# Altium PCB ESP32VoltageRegulatorPCB.PcbDoc
Units mm, origin at the board's own origin, x right, y up, seen from the top; angles counter-clockwise.
Board outline 118.06 x 43.94 mm, 2 copper layers (Top Layer, Bottom Layer); 50 components, 33 nets, 178 pads, 4 vias.
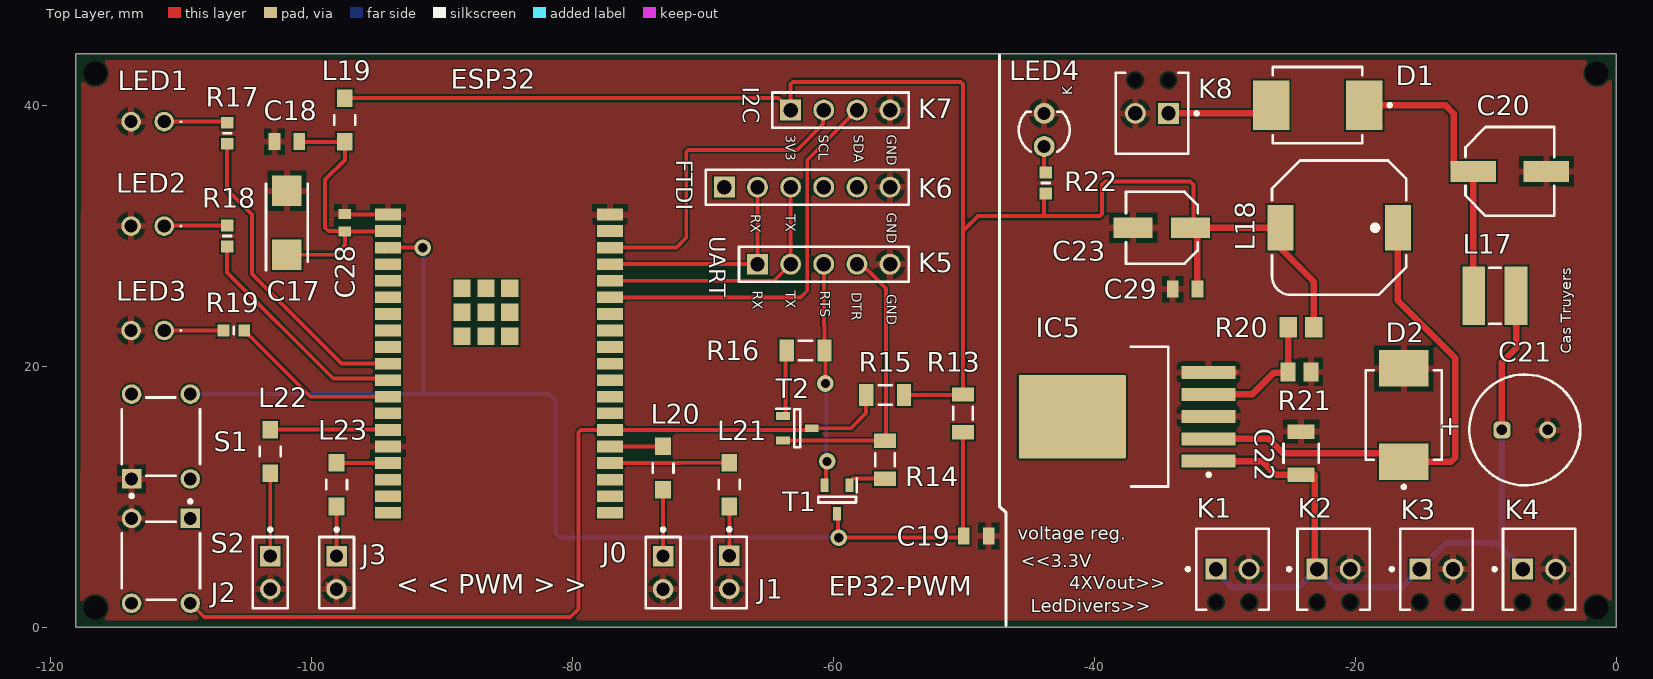
[diagram p0: Top Layer view]
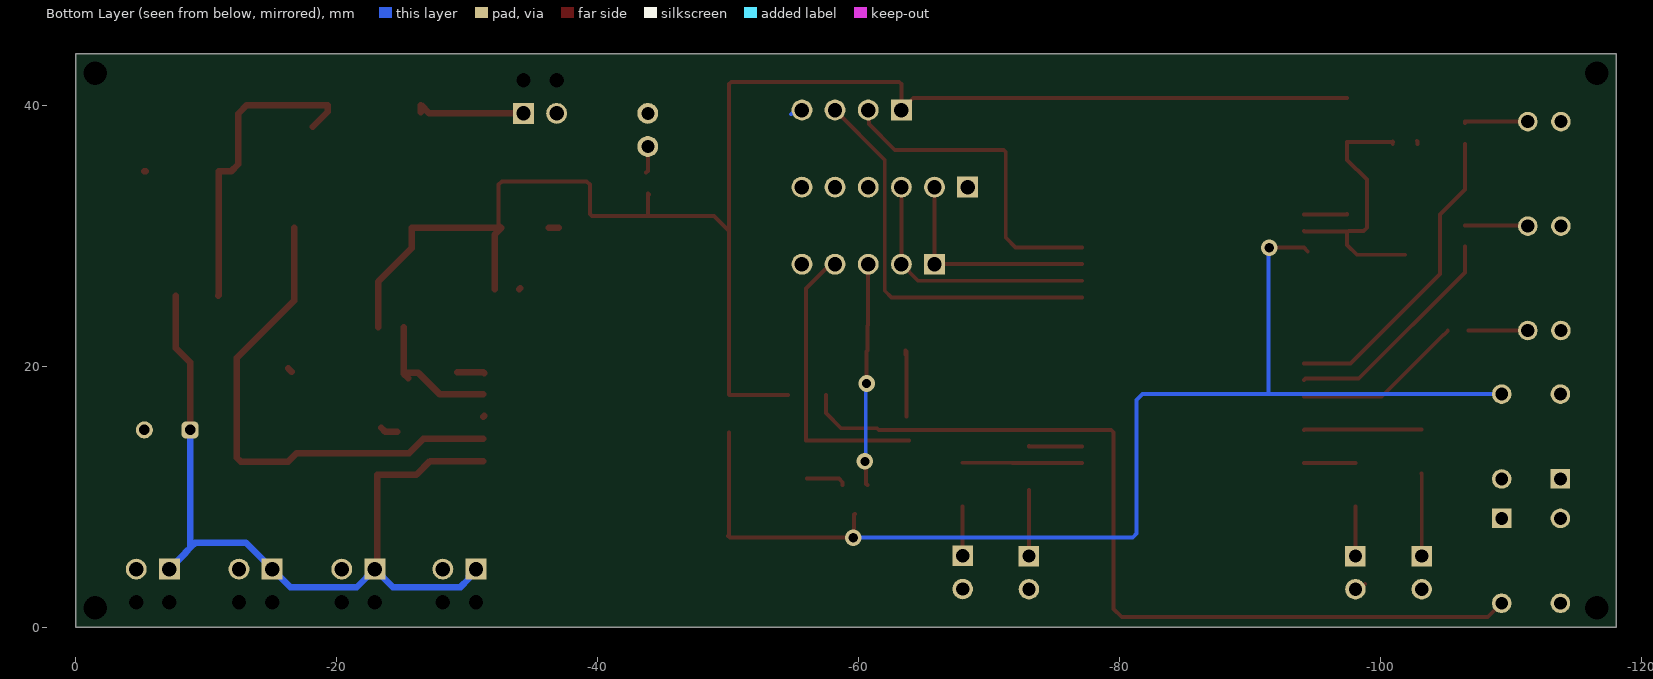
[diagram p1: Bottom Layer view, seen from below]
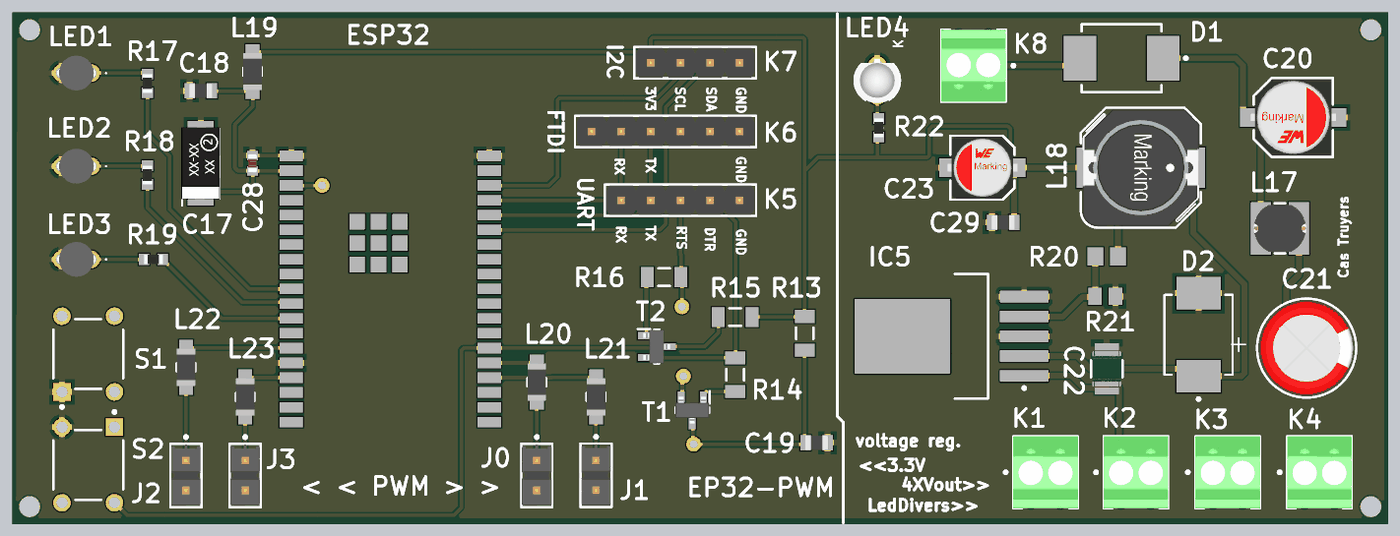
[diagram p2: 3D render of the assembled board from above, using the file's embedded part models]

## Layer stack, top to bottom
Top Solder: solder mask 0.0102, Solder Resist, Dk 3.5
Top Layer: signal copper 0.0356
Dielectric 1: dielectric 0.32, FR-4, Dk 4.8
Bottom Layer: signal copper 0.0356
Bottom Solder: solder mask 0.0102, Solder Resist, Dk 3.5

## Board outline
-118.059,0 0,0 0,43.942 -118.059,43.942

## Design rules (kind name [scope] priority, off if disabled: settings)
Clearance [All] p1: gap=0.128 ignorepadtopadclearanceinfootprint=FALSE
PolygonConnect [All] p1: connectstyle=Relief reliefconductorwidth=0.5 reliefentries=4 polygonreliefangle="90 Angle" airgapwidth=0.35
RoutingVias [All] p1: holewidth=0.711 width=1.27 viastyle="Through Hole" minholewidth=0.711 minwidth=1.27 maxholewidth=0.711 maxwidth=1.27
SMDNeckDown [All] p1: percent=50.000
SilkToSolderMaskClearance [IsPad] p1: minsilkscreentomaskgap=0.15 clearancetoexposedcopper=TRUE
SolderMaskExpansion [All] p1: expansion=0.102 istentingtop=FALSE
Width [All] p1: maxlimit=0.5 minlimit=0.3 preferedwidth=0.3
29 further rules are at their usual default settings.

## Classes and differential pairs
component class VoltageRegulator: C20 C21 C22 C23 C29 D1 D2 IC5 K1 K2 K3 K4 K8 L17 L18 LED4 R20 R21 R22
component class ESP32Schematic: C17 C18 C19 C28 ESP32 J0 J1 J2 J3 K5 K6 K7 L19 L20 L21 L22 L23 LED1 LED2 LED3 R13 R14 R15 R16 R17 R18 R19 S1 S2 T1 T2

## Components (designator, comment, footprint, x,y, rotation, side; value= is the part's Value field where it differs from the comment)
C17 "" CAPPM6032X280N -101.879,30.988 r90 top
C18 "100nF" WCAP-CSGP_0805_H=1.25mm -101.879,37.211 r180 top
C19 "100nF" WCAP-CSGP_0805_H=1.25mm -49.047,6.985 r0 top
C20 "4.7uF" WCAP-PSLP_D6.3H7.7 -8.153,34.925 r180 top
C21 "27uF" WCAP-ATUL_D8H11.5 -7.01,15.113 r180 top
C22 "" FP-GRM32-MFG -24.155,13.335 r90 top value=4.7uF
C23 "100uF" WCAP-PSLP_D5H5.5 -34.823,30.607 r0 top
C28 "" CAPC1608X87N -97.434,30.988 r90 top
C29 "100nF" WCAP-CSGP_0805_H=1.25mm -33.045,25.908 r0 top
D1 "" ONSC-SMC-2-403-03_V -22.885,40.005 r180 top
D2 "" ONSC-SMC-2-403-03_V -16.281,16.256 r90 top
ESP32 "ESP32-WROVER-B" ESP32-WROVER-B -85.623,20.193 r0 top (schematic designator U)
IC5 "LM2576HVS-ADJ/NOPB" KTT0005B_N -37.49,16.129 r180 top
J0 "" FP-TSW-102-07-G-S-MFG -73.05,4.175 r270 top
J1 "" FP-TSW-102-07-G-S-MFG -67.97,4.191 r270 top
J2 "" FP-TSW-102-07-G-S-MFG -103.149,4.175 r270 top
J3 "" FP-TSW-102-07-G-S-MFG -98.069,4.175 r270 top
K1 "1725656" PHOE-1725656-2 -29.403,4.445 r0 top
K2 "1725656" PHOE-1725656-2 -21.656,4.445 r0 top
K3 "1725656" PHOE-1725656-2 -13.782,4.445 r0 top
K4 "1725656" PHOE-1725656-2 -5.908,4.445 r0 top
K5 "61300511121" 61300511121 -60.731,27.813 r0 top
K6 "61300611121" 61300611121 -62.001,33.718 r0 top
K7 "61300411121" 61300411121 -59.461,39.624 r0 top
K8 "1725656" PHOE-1725656-2 -35.585,39.37 r180 top
L17 "2.2uH, 2.5A" WE-PD2_4532 -9.296,25.4 r0 top
L18 "470uH" WE-PD_1050P -21.234,30.607 r270 top
L19 "" SMD-1206 -97.434,38.862 r270 top
L20 "" SMD-1206 -73.05,12.192 r270 top
L21 "" SMD-1206 -67.97,10.922 r270 top
L22 "" SMD-1206 -103.149,13.462 r90 top
L23 "" SMD-1206 -98.069,10.922 r90 top
LED1 "" 151033GS03000 -111.277,38.735 r180 top
LED2 "" 151033GS03000 -111.277,30.734 r180 top
LED3 "" 151033GS03000 -111.277,22.733 r180 top
LED4 "" "Type 3mm" -43.84,38.1 r90 top
R13 "" RESC3216X60X45NL10T20 -50.063,16.383 r90 top
R14 "" RESC3216X60X45NL10T20 -56.032,12.827 r90 top
R15 "" RESC3216X60X45NL10T20 -56.032,17.78 r0 top
R16 "" RESC3216X60X45NL10T20 -62.128,21.209 r0 top
R17 "" RESC1608X55N -106.451,37.846 r270 top
R18 "" RESC1608X55N -106.451,29.972 r270 top
R19 "" RESC1608X55N -105.943,22.733 r0 top
R20 "2K7" RESC2013X70X40ML20T20 -24.155,22.987 r0 top
R21 "" RESC2013X70X40NL20T20 -24.282,19.558 r180 top
R22 "" RESC1608X55N -43.713,34.036 r270 top
S1 "" TECO-1825910-6_V -111.531,14.605 r90 top
S2 "" TECO-1825910-6_V -111.531,5.08 r270 top
T1 "" SOT95P230X110-3N -59.715,9.779 r270 top
T2 "" SOT95P230X110-3N -62.763,15.24 r0 top

## Footprints (in the part's own frame and the unit in brackets; to place one, negate y for a bottom-side part, rotate by r counter-clockwise, add the part's x,y. Pads: shape width x height; smd on the part's side, far side on the other; paste and mask are expansions set on the pad)
151033GS03000 [mm]
  round 1.5 hole 1: 1(0,0) 2(2.54,0)
  silkscreen extent -1.33,-0.05 -1.23,0.05, body extent -0.4,-1.5 2.94,1.5, height 5.65
61300411121 [mm] "Pin Header, pitch 2.54 mm, THT, Vertical, single row, 4p"
  rect 1.6x1.6 hole 1.1: 1(-3.81,0)
  round 1.6 hole 1.1: 2(-1.27,0) 3(1.27,0) 4(3.81,0)
  silkscreen extent -5.23,-1.34 5.23,1.34, body extent -5.08,-1.27 5.08,1.27, height 8.57
61300511121 [mm] "Pin Header, pitch 2.54 mm, THT, Vertical, single row, 5p"
  rect 1.6x1.6 hole 1.1: 1(-5.08,0)
  round 1.6 hole 1.1: 2(-2.54,0) 3(0,0) 4(2.54,0) 5(5.08,0)
  silkscreen extent -6.5,-1.34 6.5,1.34, body extent -6.35,-1.27 6.35,1.27, height 8.57
61300611121 [mm] "Pin Header, pitch 2.54 mm, THT, Vertical, single row, 6p"
  rect 1.6x1.6 hole 1.1: 1(-6.35,0)
  round 1.6 hole 1.1: 2(-3.81,0) 3(-1.27,0) 4(1.27,0) 5(3.81,0) 6(6.35,0)
  silkscreen extent -7.77,-1.34 7.77,1.34, body extent -7.62,-1.27 7.62,1.27, height 8.57
CAPC1608X87N [mm]
  rect 0.8x0.94 smd: 1(-0.67,0) 2(0.67,0)
  body extent -0.8,-0.4 0.8,0.4, height 0.87
CAPPM6032X280N [mm]
  rect 2.35x2.25 smd: 1(-2.45,0) 2(2.45,0)
  silkscreen extent -3.62,-1.6 3,1.6, body extent -3.1,-1.67 3.1,1.68, height 2.54
ESP32-WROVER-B [mm]
  rect 2x0.9 smd: P$1(-8.5,11.43) P$2(-8.5,10.16) P$3(-8.5,8.89) P$4(-8.5,7.62) P$5(-8.5,6.35) P$6(-8.5,5.08) P$7(-8.5,3.81) P$8(-8.5,2.54) P$9(-8.5,1.27) P$10(-8.5,0) P$11(-8.5,-1.27) P$12(-8.5,-2.54) P$13(-8.5,-3.81) P$14(-8.5,-5.08) P$15(-8.5,-6.35) P$16(-8.5,-7.62) P$17(-8.5,-8.89) P$18(-8.5,-10.16) P$19(-8.5,-11.43) P$20(8.5,-11.43) P$21(8.5,-10.16) P$22(8.5,-8.89) P$23(8.5,-7.62) P$24(8.5,-6.35) P$25(8.5,-5.08) P$26(8.5,-3.81) P$27(8.5,-2.54) P$28(8.5,-1.27) P$29(8.5,0) P$30(8.5,1.27) P$31(8.5,2.54) P$32(8.5,3.81) P$33(8.5,5.08) P$34(8.5,6.35) P$35(8.5,7.62) P$36(8.5,8.89) P$37(8.5,10.16) P$38(8.5,11.43)
  rect 1.33x1.33 smd: P$39(-1,3.93) P$40(0.835,3.93) P$41(0.835,5.765) P$42(-1,5.765) P$43(-2.835,5.765) P$44(-2.835,3.93) P$45(-2.835,2.095) P$46(-1,2.095) P$47(0.835,2.095)
FP-GRM32-MFG [mm]
  rect 1.1x2.05 smd paste+0 mask+0: 1(-1.65,0) 2(1.65,0)
  silkscreen extent -0.73,-1.35 0.73,1.35, body extent -2.3,-1.45 2.3,1.45, height 0.25
FP-TSW-102-07-G-S-MFG [mm]
  rect 1.57x1.57 hole 1.02 paste-1000 mask+0: 1(-1.27,0)
  round 1.57 hole 1.02 paste-1000 mask+0: 2(1.27,0)
  silkscreen extent -3.42,-1.34 2.73,1.34, body extent -2.83,-1.44 2.83,1.44, height 0.25
KTT0005B_N [mm] "DPAK, 5-Leads, Body 10.65x9.65mm, Pitch 1.7mm, IPC Medium Density"
  rrect10% 4.15x1 smd: 1(-6.25,3.4) 2(-6.25,1.7) 3(-6.25,0) 4(-6.25,-1.7) 5(-6.25,-3.4)
  rrect2% 8.2x6.4 smd: 6(4.2,0)
  silkscreen extent -6.38,-5.35 -0.3,5.35, body extent -3.15,-5.32 6.5,5.33, height 4.83
ONSC-SMC-2-403-03_V [mil] "Molded, 2-Leads, Body 6.86x5.84mm"
  rect 110x150 smd: 1(-140.49,0) 2(140.49,0)
  silkscreen extent -222,-115 135,115, body extent -135,-115 135,115, height 99
PHOE-1725656-2 [mm] "Connector, 2-Leads, Body 6.2x5.4mm, Pitch 2.54mm"
  rect 1.6x1.6 hole 1.1: 1(-1.27,0)
  round 1.6 hole 1.1: 2(1.27,0)
  round 0 hole 1.1 unplated: MH1(-1.27,-2.54) MH2(1.27,-2.54)
  silkscreen extent -3.54,-3.1 2.77,3.1, body extent -2.77,-3.1 2.77,3.1, height 9
RESC1608X55N [mm]
  rect 0.9x0.95 smd: 1(-0.8,0) 2(0.8,0)
  silkscreen extent 0,-0.3 0,0.3, body extent -0.8,-0.4 0.8,0.4, height 0.55
RESC2013X70X40ML20T20 [mm] "Chip Resistor, 2-Leads, Body 2.00x1.25mm, IPC Low Density"
  rect 1.35x1.55 smd: 1(-0.975,0) 2(0.975,0)
  body extent -1.1,-0.72 1.1,0.72, height 0.7
RESC2013X70X40NL20T20 [mm] "Chip Resistor, 2-Leads, Body 2.00x1.25mm, IPC Medium Density"
  rect 1.15x1.45 smd: 1(-0.875,0) 2(0.875,0)
  body extent -1.1,-0.72 1.1,0.72, height 0.7
RESC3216X60X45NL10T20 [mm] "Chip Resistor, 2-Leads, Body 3.20x1.60mm, IPC Medium Density"
  rect 1.1x1.7 smd: 1(-1.45,0) 2(1.45,0)
  silkscreen extent -0.5,-0.75 0.5,0.75, body extent -1.65,-0.85 1.65,0.85, height 0.6
SMD-1206 [mm] "Chip Inductor, 2-Leads, Body 3.2x1.6mm"
  rect 1.35x1.2 smd: 1(-1.675,0) 2(1.675,0)
  silkscreen extent -0.35,-0.8 0.35,0.8, body extent -1.6,-0.8 1.6,0.8, height 1.09
SOT95P230X110-3N [mm]
  rect 1.05x0.6 smd: 1(-1.1,0.95) 2(-1.1,-0.95) 3(1.1,0)
  silkscreen extent -1.62,-1.45 0.22,1.5, body extent -1.15,-1.45 1.15,1.45, height 1.1
TECO-1825910-6_V [mm] "Switch, 4-Leads, Body 5.99x5.99mm"
  rect 1.5x1.5 hole 0.99: 1(-3.25,2.25)
  round 1.5 hole 0.99: 2(3.25,2.25) 3(-3.25,-2.25) 4(3.25,-2.25)
  silkscreen extent -4.67,-3 3,3, body extent -3,-2.99 2.99,3, height 5
"Type 3mm" [mm] "THT, LED-3mm, 2pin- Body 4.15mm(max)"
  round 1.6 hole 1: 1(1.27,0) 2(-1.27,0)
  silkscreen extent -1.66,-1.95 1.4,1.95, body extent -1.93,-1.94 1.87,1.94, height 10.5
WCAP-ATUL_D8H11.5 [mm] "Aluminum Electrolytic Capacitors, 8x11.5mm"
  rrect50% 1.3x1.3 hole 0.8: 1(1.75,0)
  round 1.3 hole 0.8: 2(-1.75,0)
  silkscreen extent -4.25,-4.25 4.25,4.25, body extent -3.99,-4 4,4, height 11.81
WCAP-CSGP_0805_H=1.25mm [mm] "Ceramic Capacitors, body 2x1.25mm"
  rect 0.9x1.3 smd: 1(-0.95,0) 2(0.95,0)
  body extent -1,-0.62 1,0.63, height 1.25
WCAP-PSLP_D5H5.5 [mm] "Aluminum Polymer Capacitors, body diameter 5mm"
  rect 3x1.6 smd: 1(2.2,0) 2(-2.2,0)
  silkscreen extent -2.75,-2.75 2.75,2.75, body extent -3,-2.65 3,2.65, height 5.5
WCAP-PSLP_D6.3H7.7 [mm] "Aluminum Polymer Capacitors, body diameter 6.3mm"
  rect 3.5x1.6 smd: 1(2.8,0) 2(-2.8,0)
  silkscreen extent -3.4,-3.4 3.4,3.4, body extent -3.65,-3.3 3.65,3.3, height 7.7
WE-PD2_4532 [mm] "SMD Power Inductor, 2-Leads, body 4x4.5mm"
  rect 1.75x4.5 smd: 1(-1.625,0) 2(1.625,0)
  silkscreen extent -0.45,-2.15 0.45,2.15, body extent -2.25,-2 2.25,2, height 3.22
WE-PD_1050P [mm] "SMD Shielded Power Inductor, 2-leads, body 10x10mm"
  rect 3.5x2 smd: 1(0,4.5) 2(0,-4.5)
  silkscreen extent -5.15,-5.15 5.15,5.15, body extent -5,-5 5,5, height 4.79

## Part data
C17: library part 293D476X9010C2TE3, "Capacitor Polarised", Manufacturer_Name=Vishay, Mouser Part Number=74-293D476X9010C2TE3, Arrow Part Number=293D476X9010C2TE3, Arrow Price/Stock=https://www.arrow.com/en/products/293d476x9010c2te3/vishay, Datasheet Link=http://www.vishay.com/doc?40002, Height=2.8mm, Manufacturer_Part_Number=293D476X9010C2TE3, Mouser Price/Stock=https://www.mouser.co.uk/ProductDetail/Vishay-Sprague/293D476X9010C2TE3?qs=L4BSZja3YaLjW7yb5EwZTw%3D%3D
C18 C19 C29: library part 885012207128, "WCAP-CSGP Multilayer Ceramic Chip Capacitor, General Purpose, size 0805, X7R, 100nF, 100V", Capacitance Tolerance=+/-10%, Isolation Resistance=>=1GOhm, Manufacturer="Wurth Elektronik", Operating Temperature="-55 to +125degC", Rated Voltage=100VDC, Capacitance=100nF, Ceramic Type=X7R, ComponentLink1Description=Manufacturer, ComponentLink1URL=http://www.we-online.de, ComponentLink2Description=Datasheet, ComponentLink2URL=https://www.we-online.com/catalog/datasheet/885012207128.pdf, Dissipation Factor=#NAME?, Height=1.25mm, Manufacturer Part Number=885012207128, Mounting Technology=SMT, Packaging="Tape and Reel", Published Date="May 2020", Size=0805, Technical Reference=X7R0805104K100DFCT10000
C20: library part 875105945001, "WCAP-PSLP Aluminum Polymer Capacitor, V-Chip, SMT, D6.3xH7.7mm, 4.7uF, 100V", Capacitance Tolerance=+/-20%, Leakage Current=600uA, Manufacturer="Wurth Elektronik", Operating Temperature="-55 to +105degC", Rated Voltage=100VDC, Ripple Current=1060mA, Capacitance=4.7uF, ComponentLink1Description=Manufacturer, ComponentLink1URL=http://www.we-online.de, ComponentLink2Description=Datasheet, ComponentLink2URL=https://www.we-online.com/catalog/datasheet/875105945001.pdf, Diameter=6.3mm, Dissipation Factor=12%, Endurance=2000h, ESR=100mOhm, Height=7.7mm, Manufacturer Part Number=875105945001, Mounting Technology=SMT, Packaging="Tape and Reel", Published Date="October 2020", Technical Reference=PSED0774R7M100DVCTCB000
C21: library part 860040874001, "WCAP-ATUL Aluminum Electrolytic Capacitor, Radial, THT, D8xH11.5mm, 27uF, 100V", Capacitance Tolerance=+/-20%, Leakage Current=27uA, Manufacturer="Wurth Elektronik", Operating Temperature="-40 to +105degC", Rated Voltage=100VDC, Ripple Current=300mA, Capacitance=27uF, ComponentLink1Description=Manufacturer, ComponentLink1URL=http://www.we-online.de, ComponentLink2Description=Datasheet, ComponentLink2URL=https://www.we-online.com/catalog/datasheet/860040874001.pdf, Diameter=8mm, Dissipation Factor=9%, Endurance=7000h, Height=11.5mm, Manufacturer Part Number=860040874001, Mounting Technology=THT, Packaging="Ammo Pack", Published Date="October 2020", Technical Reference=ATDE115270M100DSPA7G000
C22: library part CMP-1038-02162-3, "CAP CER 4.7UF 50V X7R 1210", Capacitance=4.7uF, Manufacturer=Murata, Manufacturer Part Number=GRM32ER71H475KA88L, Package=GRM32, Temperature="-55°C to +125°C", Temperature Characteristic=X7R, Temperature Coefficient=15%, Temperature Range High=+125°C, Temperature Range Low=-55°C, Tolerance=10%, Voltage Rating=50V, Automotive=No, Category=Cap, ComponentLink2Description=Datasheet, ComponentLink2URL=https://search.murata.co.jp/Ceramy/image/img/A01X/G101/ENG/GRM32ER71H475KA88-01A.pdf, Device Class L1="Passive Components", Device Class L2=Capacitors, Device Class L3="Ceramic Capacitors", Digikey Description="CAP CER 4.7UF 50V X7R 1210", Height=2.7mm, Lead Free=Yes, Material=Ceramic, Mouser Description="Capacitor Capacitance tolerance: ±10% Ceramic type: X7R Construction form: 1210 Capacitance: 4.7 µF Rated voltage: 50...", Octopart=https://octopart.com/grm32er71h475ka88l-murata-196576, RoHS=TRUE
C23: library part 875105242010, "WCAP-PSLP Aluminum Polymer Capacitor, V-Chip, SMT, D5xH5.5mm, 100uF, 10V", Capacitance Tolerance=+/-20%, Leakage Current=300uA, Manufacturer="Wurth Elektronik", Operating Temperature="-55 to +105degC", Rated Voltage=10VDC, Ripple Current=1970mA, Capacitance=100uF, ComponentLink1Description=Manufacturer, ComponentLink1URL=http://www.we-online.de, ComponentLink2Description=Datasheet, ComponentLink2URL=https://www.we-online.com/catalog/datasheet/875105242010.pdf, Diameter=5mm, Dissipation Factor=8%, Endurance=2000h, ESR=30mOhm, Height=5.5mm, Manufacturer Part Number=875105242010, Mounting Technology=SMT, Packaging="Tape and Reel", Published Date="October 2020", Technical Reference=PSEC055101M010DVCTBB000
C28: library part 885012206034, "Capacitor", Manufacturer_Name="Wurth Elektronik", Mouser Part Number=710-885012206034, Datasheet Link=https://katalog.we-online.com/pbs/datasheet/885012206034.pdf, Height=0.87mm, Manufacturer_Part_Number=885012206034, Mouser Price/Stock=https://www.mouser.com/Search/Refine.aspx?Keyword=710-885012206034
D1 D2: library part CMP-1055-00390-1, "Schottky Power Rectifier, 2-Pin SMC, Pb-Free, Tape and Reel", Manufacturer="On Semiconductor", PartNumber=MBRS540T3G, ComponentLink1Description="Manufacturer URL", ComponentLink1URL=http://www.onsemi.com/, ComponentLink2Description=Datasheet, ComponentLink2URL=http://www.onsemi.cn/pub_link/Collateral/MBRS540T3-D.PDF, ComponentLink3Description="Package Specification", ComponentLink3URL=http://www.onsemi.com/pub_link/Collateral/403-03.PDF, Configuration=Single, DatasheetVersion="Rev. 8", IFSM Max (A)=190, Mounting Technology="Surface Mount", PackageDescription="2-Pin Small Molded Package, J-Bend Lead, Body 5.845 x 6.855 mm", PackageReference=SMC-2-403-03, PackageVersion="Rev. E, 08/2005", Packing="Tape and Reel", RoHS=TRUE
ESP32: "SMD MODULE ESP32-D0WD 32MBIT", Package="Module Espressif Systems", Availability=Unavailable, ComponentLink1Description="New link", MF="Espressif Systems", MP=ESP32-WROVER-B, Price=None, SnapEDA_Link=https://www.snapeda.com/parts/ESP32-WROVER-B/Espressif%20Systems/view-part/2877843/?ref=snap
IC5: library part CMP-0069-00134-3, "SIMPLE SWITCHER® 3A Step-Down Voltage Regulator, 5-pin TO-263, Pb-Free", Manufacturer="Texas Instruments", PackageTopMarking="NSUZXYTTE#*LM2576*HVS-ADJ P+", PowerWise=N, Code_JEDEC=MO-169-AB, ComponentLink1Description="Datasheet URL", ComponentLink1URL=http://www.ti.com/general/docs/lit/getliterature.tsp?genericPartNumber=LM2576HV&fileType=pdf, CompType=Switcher, PackageDescription="TO-263, Molded, .400 x .390 x .180in, 5 Lead, .067in Pitch, Surface Mount", PackageReference=KTT0005B, PinCount=5, RoHS=Y
J0 J1 J2 J3: library part CMP-02766-000084-1, "CONN HEADER VERT 2POS 2.54MM", Current Rating=6.3A, Manufacturer=Samtec, Manufacturer Part Number=TSW-102-07-G-S, Temperature="-55°C to +125°C", Temperature Range High=+125°C, Temperature Range Low=-55°C, Voltage Rating=550V, Automotive=No, Category=Conn, ComponentLink2Description=Datasheet, ComponentLink2URL=http://suddendocs.samtec.com/catalog_english/tsw_th.pdf, Conn Gender=Male, Conn Orientation=Straight, Contact Material=Gold,Nickel, Device Class L1=Connectors, Device Class L2="Headers and Wire Housings", Device Class L3=unset, Digikey Description="CONN HEADER VERT 2POS 2.54MM", Footprint Url=http://suddendocs.samtec.com/prints/tsw-xxx-xx-x-x-xx-xxx-footprint.pdf, Height=8.71mm, Lead Free=Yes, Mouser Description="Conn Unshrouded Header HDR 2 POS 2.54mm Solder ST Thru-Hole Automotive Bulk", Number Of Contacts=2, Number Of Rows=1, Octopart=https://octopart.com/tsw-102-07-g-s-samtec-272197, Package=TSW-102-07-G-S, Pitch=2.54mm, RoHS=TRUE
K1 K2 K3 K4 K8: library part CMP-2000-05299-1, "Male Header, Pitch 2.54 mm, 1 x 2 Position, Height 9 mm, Tail Length 3.5 mm", Colour=Green, Manufacturer="Phoenix Contact", Content=250pc(s), Datasheet URL=http://datasheet.octopart.com/1725656-Phoenix-Contact-datasheet-5302866.pdf, Datasheet Version=Apr-08, Industrial packaging=Yes, Manufacturer part No.=1725656, Manufacturer URL=http://www.phoenixcontact.com/, Number Of Contacts=2, Pitch=2.54mm, Type=MPT0,5/2-2,54
K5: library part CMP-1502-01068-1, "THT Vertical Pin Header WR-PHD, Pitch 2.54 mm, Single Row, 5 pins", Contact Resistance=20mOhm, Manufacturer="Wurth Elektronik", Operating Temperature=-40to105degC, Rated Current=3A, Withstanding Voltage=500VAC, Working Voltage=250VAC, Datasheet URL=https://katalog.we-online.de/em/datasheet/6130xx11121.pdf, Gender=Male, Manufacturer URL=http://www.we-online.de, Mounting Technology=THT, Orientation=Vertical, Package Reference=61300511121, Packaging=Bag, Part Number=61300511121, Pin Number=5, Pitch=2.54mm, Publisher=WurthElektronik, Row Number=Single
K6: library part CMP-1502-01070-1, "THT Vertical Pin Header WR-PHD, Pitch 2.54 mm, Single Row, 6 pins", Contact Resistance=20mOhm, Manufacturer="Wurth Elektronik", Operating Temperature=-40to105degC, Rated Current=3A, Withstanding Voltage=500VAC, Working Voltage=250VAC, Datasheet URL=https://katalog.we-online.de/em/datasheet/6130xx11121.pdf, Gender=Male, Manufacturer URL=http://www.we-online.de, Mounting Technology=THT, Orientation=Vertical, Package Reference=61300611121, Packaging=Bag, Part Number=61300611121, Pin Number=6, Pitch=2.54mm, Publisher=WurthElektronik, Row Number=Single
K7: library part CMP-1502-01064-1, "THT Vertical Pin Header WR-PHD, Pitch 2.54 mm, Single Row, 4 pins", Contact Resistance=20mOhm, Manufacturer="Wurth Elektronik", Operating Temperature=-40to105degC, Rated Current=3A, Withstanding Voltage=500VAC, Working Voltage=250VAC, Datasheet URL=https://katalog.we-online.de/em/datasheet/6130xx11121.pdf, Gender=Male, Manufacturer URL=http://www.we-online.de, Mounting Technology=THT, Orientation=Vertical, Package Reference=61300411121, Packaging=Bag, Part Number=61300411121, Pin Number=4, Pitch=2.54mm, Publisher=WurthElektronik, Row Number=Single
L17: library part 744773022, "WE-PD2 SMT Power Inductor, size 4532, 2.2uH, 2.5A", DC Resistance max.=0.071Ohm, DC Resistance typ.=0.034Ohm, Inductance=2.2uH, Manufacturer="Wurth Elektronik", Operating Temperature="-40 to +125degC", Rated Current=2.5A, Saturation Current=3.38A, Self Resonant Frequency=85MHz, ComponentLink1Description=Manufacturer, ComponentLink1URL=http://www.we-online.de, ComponentLink2Description=Datasheet, ComponentLink2URL=https://www.we-online.com/catalog/datasheet/744773022.pdf, Manufacturer Part Number=744773022, Mounting Technology=SMT, Packaging="Tape and Reel", Published Date="April 2020", Size=4532
L18: library part 7447714471, "WE-PD SMT Power Inductor, size 1050P, 470uH, 0.6A, 960mOhm", DC Resistance max.=1100mOhm, DC Resistance typ.=960mOhm, Manufacturer="Wurth Elektronik", Operating Temperature="-40 to +150degC", Rated Current=0.6A, Saturation Current=0.82A, Self Resonant Frequency=2.5MHz, ComponentLink1Description=Manufacturer, ComponentLink1URL=http://www.we-online.de, ComponentLink2Description=Datasheet, ComponentLink2URL=https://www.we-online.com/catalog/datasheet/7447714471.pdf, Inductance=470uH, Manufacturer Part Number=7447714471, Mounting Technology=SMT, Packaging="Tape and Reel", Published Date="August 2020", Size=1050P, Type=Performance
L19 L20 L21 L22 L23: library part CMP-0220-00019-1, "SMD EMI Suppression Ferrite Bead WE-CBF, Z = 31Ohm", ComponentLink1Description="Manufacturer Link", ComponentLink1URL=http://www.we-online.com, ComponentLink2Description=Datasheet, ComponentLink2URL=http://www.we-online.de/katalog/media/pdf/742792112.pdf, DatasheetVersion=Dec-2005, Impedance=31Ohm, PackageDescription="Chip Inductor, 2-Leads, Body 3.2 x 1.6 mm", PackageReference=SMD-1206, PackageVersion=2007
LED1 LED2 LED3: library part 151033GS03000, "LED", Manufacturer_Name="Wurth Elektronik", Mouser Part Number=710-151033GS03000, Datasheet Link=https://www.mouser.com/datasheet/2/445/151033GS03000-1715304.pdf, Height=5.55mm, Manufacturer_Part_Number=151033GS03000, Mouser Price/Stock=https://www.mouser.com/Search/Refine.aspx?Keyword=710-151033GS03000
LED4: library part CMP-1489-00002-1, "THT LED round mono-color waterclear, WL-TMRW , Blue", Emitting color=Blue, Manufacturer="Wuerth Elektronik", PartNumber=151033BS03000, ComponentLink1Description="Manufacturer URL", ComponentLink1URL=http://www.we-online.com, ComponentLink2Description=Datasheet, ComponentLink2URL=http://katalog.we-online.de/pbs/datasheet/7448042001.pdfhttp://katalog.we-online.de/pbs/datasheet/7448042001.pdfhttp://katalog.we-online.de/pbs/datasheet/7448042001.pdfhttp://katalog.we-online.de/pbs/datasheet/151033BS03000.pdf, PackageReference="Type 3mm"
R13 R14 R15 R16: library part CMP-2003-02453-1, Manufacturer="Vishay Dale", Part Number=CRCW120610K0JNEB
R17 R18 R19 R22: library part RC0603JR-071KL, "Resistor", Manufacturer_Name="YAGEO (PHYCOMP)", Mouser Part Number=603-RC0603JR-071KL, Arrow Part Number=RC0603JR-071KL, Arrow Price/Stock=https://www.arrow.com/en/products/rc0603jr-071kl/yageo, Datasheet Link=http://www.yageo.com/documents/recent/PYu-RC0603_51_RoHS_L_v5.pdf, Height=0.55mm, Manufacturer_Part_Number=RC0603JR-071KL, Mouser Price/Stock=https://www.mouser.co.uk/ProductDetail/Yageo/RC0603JR-071KL?qs=%2F9ZTgpVJnN7bctK4R%2FDEoA%3D%3D
R20: library part CMP-2001-00387-1, Manufacturer=Panasonic, Part Number=ERJ-6GEYJ272V
R21: library part CMP-2001-00515-1, Manufacturer=Panasonic, Part Number=ERJ6ENF1601V
S1 S2: library part CMP-1684-00021-1, "Tact Switch, SPST-NO, 0.05 A, -35 to 85 degC, 4-Pin THD, RoHS, Bulk", Actuator Color=Black, Contact Rating @ Voltage=0.05A@24VDC, Dielectric Strength=500VAC, Manufacturer="TE Connectivity", Maximum AC Voltage Rating=N/A, Maximum Contact Resistance=100mOhm, Maximum DC Voltage Rating=24V, Minimum Insulation Resistance=100MOhm, Operating Temperature=-35to85C, Package Description="4-Pin Through Hole Device, Body 5.99 x 5.99 mm, Pitch 6.5 mm", Package Reference=THD, Part No=1825910-6, Actuator Length=1.4mm, Actuator Material=PolybutyleneTerephthalate, Actuator Style=RoundButton, Base Material=N/A, Body Orientation=Straight, Bushing Type=Unthreaded, Contact Material=CopperAlloy, Contact Plating=Silver, Datasheet URL=http://www.te.com/commerce/DocumentDelivery/DDEController?Action=showdoc&DocId=Customer+Drawing%7F1825910%7FC9%7Fpdf%7FEnglish%7FENG_CD_1825910_C9.pdf%7F1825910-6, Datasheet Version="Rev. C9", Dimension=5.99x5mm, Electrical Life=100000Cycles, Family=1825910, Function=MomentaryContact, Housing Material=N/A, Illumination=N/R, Manufacturer URL=http://www.te.com, Mechanical Life=100000Cycles, Mounting=ThroughHole, Packaging=N/A, Pole Throw Configuration=SPST, Product Weight=N/A, RoHS=Yes, Seal Description=N/A, Seal Location=N/A, Switch Configuration=OFF(ON), Terminal Type=PCPins, Thread Size=N/R
T1 T2: library part BC847C_AU,215, "Transistor BJT NPN", Manufacturer_Name=Nexperia, Manufacturer_Part_Number=BC847C/AU,215, Datasheet Link=http://assets.nexperia.com/documents/data-sheet/BC847_SER.pdf, Height=1.1mm

## Free pads (board coordinates)
  round 1.524 hole 1.8: 5(-116.561,1.499) 5(-116.561,42.443) 5(-1.499,1.499) 5(-1.499,42.443)

## Via types
v1: diameter 1.27, hole 0.711, Top Layer to Bottom Layer, 4 vias

## Nets (pads, with @x,y where several pads share a name; then routed paths per layer and width w, separated by ;. In a path a pad name is that pad's centre, name@x,y a point inside that pad or via, vN(x,y) a via of type N, cw(c..) or ccw(c..) an arc to the next point about the centre after c; other vN are vias at no path point)
GND: C17.2 C18.2 C19.2 C20.2 C21.2 C22.2 C23.2 C28.2 C29.1 D2.2 ESP32.P$1 ESP32.P$15 ESP32.P$38 IC5.3 IC5.5 J0.2 J1.2 J2.2 J3.2 K1.2 K2.2 K3.2 K4.2 K5.5 K6.6 K7.4 K8.2 LED1.2 LED2.2 LED3.2 LED4.1 R21.1 S1.1 S2.3 | length 11.5
  Top Layer w0.3: J2.2@-103.165,2.921 J2.2 ; C18.2@-102.829,37.008 C18.2 C18.2@-102.768,37.272 ; -98.825,3.296 -98.804,3.296 -98.413,2.905 J3.2 ; C28.2 -97.434,31.623 ESP32.P$1 ; J0.2 J0.2@-73.042,2.913 ; J1.2@-67.978,2.913 J1.2 ; K5.5 K5.5@-55.524,27.813 ; K7.4 K7.4@-55.456,39.429 ; K1.2 K1.2@-28.133,4.74
  Top Layer w0.5: C23.2 -36.855,30.607 C23.2@-36.246,30.607 ; C29.1@-34.061,25.974 C29.1 ; IC5.3@-31.319,16.207 IC5.3 ; IC5.5@-31.319,19.451 IC5.5 ; IC5.5@-31.217,19.529 IC5.5@-29.235,19.529 ; C22.2@-24.63,14.985 C22.2 -23.707,14.985 C22.2@-23.407,15.285 ; D2.2@-16.548,19.558 D2.2 ; C20.2 C20.2@-5.258,34.925 ; K4.2 K4.2@-4.638,4.666
  Bottom Layer w0.3: J2.2 J2.2@-103.133,2.921 ; K7.4 -55.403,39.375 -54.894,39.375 -54.826,39.306 ; LED4.1@-43.904,39.306 LED4.1
  Bottom Layer w0.5: K2.2@-20.429,4.488 K2.2
NetC17_1: C17.1 C18.1 C28.1 ESP32.P$2 L19.2 | length 21.7
  Top Layer w0.3: C17.1 -98.196,28.538 -97.434,29.3 C28.1 ; C18.1@-100.94,37.187 C18.1@-100.929,37.187 ; C18.1@-100.929,37.011 C18.1@-100.929,37.187 ; C18.1 C18.1@-100.929,37.187 ; ESP32.P$2 -94.158,30.318 C28.1 ; C18.1@-100.929,37.187 L19.2 -97.434,35.814 -98.958,34.29 -98.958,30.607 -98.704,30.353 -97.561,30.353 -97.48,30.272 C28.1
NetC19_1: C19.1 ESP32.P$3 R13.1 S1.4 T1.3 | length 94.1
  Top Layer w0.3: ESP32.P$3@-94.418,28.789 ESP32.P$3 v1(-91.465,29.083) ; T1.3 -59.652,8.615 -59.652,6.921 v1(-59.588,6.858) -50.124,6.858 C19.1 -50.063,7.051 R13.1
  Bottom Layer w0.3: S1.4 -91.338,17.855 ; v1(-91.465,29.083) -91.402,29.019 -91.402,17.918 -91.338,17.855 ; v1(-59.588,6.858) -81.003,6.858 -81.305,7.161 -81.305,17.399 -81.761,17.855 -91.338,17.855
NetC20_1: C20.1 D1.1 L17.1 | length 24.4
  Top Layer w0.5: D1.1@-18.17,38.35 -19.317,39.497 D1.1 -13.106,40.005 -12.453,39.352 -12.453,35.475 -11.903,34.925 C20.1 -10.953,25.432 L17.1
NetC21_1: C21.1 C22.1 IC5.1 K1.1 K2.1 K3.1 K4.1 L17.2 | length 63.3
  Top Layer w0.5: IC5.1 -27.153,12.729 -26.109,11.685 C22.1 -23.089,11.685 -23.089,4.607 K2.1 ; C21.1@-8.788,15.085 C21.1 -8.76,20.298 -7.671,21.387 L17.2
  Bottom Layer w0.5: K1.1 -30.123,3.895 -30.123,3.707 -29.489,3.073 -24.298,3.073 K2.1 -21.529,3.048 -16.449,3.048 K3.1 -13.02,6.477 -9.169,6.477 -8.809,6.117 ; C21.1 -8.76,6.165 -8.809,6.117 ; K4.1 -8.449,5.716 -8.449,5.757 -8.809,6.117
NetC23_1: C23.1 C29.2 K7.1 L18.2 L19.1 R13.2 R15.2 R20.2 R22.2 | length 124.6
  Top Layer w0.3: L19.1 -64.184,40.537 K7.1 -63.271,41.607 -63.096,41.783 -50.239,41.783 -50.063,41.607 -50.063,30.353 ; R15.2 -50.116,17.78 R13.2 -50.063,30.353 ; R22.2@-43.929,33.147 -43.84,33.236 -43.84,31.496 ; C23.1 -32.664,30.648 -32.41,30.902 -32.41,33.909 -32.664,34.163 -39.141,34.163 -39.395,33.909 -39.395,31.672 -39.571,31.496 -43.84,31.496 ; -50.063,30.353 -48.92,31.496 -43.84,31.496
  Top Layer w0.5: C29.2 -32.095,30.079 C23.1 L18.2 -25.734,29.036 -23.18,26.482 R20.2
NetD1_2: D1.2 K8.1 | length 8.8
  Top Layer w0.5: K8.1 -27.089,39.37 D1.2 D1.2@-26.454,39.446
  Bottom Layer w0.5: K8.1 K8.1@-34.315,39.446
NetD2_1: D2.1 IC5.2 L18.1 | length 39.2
  Top Layer w0.5: IC5.2 -26.646,14.429 -25.552,13.335 -16.929,13.335 D2.1 -12.637,12.688 -12.344,12.98 -12.344,20.625 -16.734,25.015 L18.1
NetIC5_4: IC5.4 R20.1 R21.2 | length 11
  Top Layer w0.5: IC5.4 -27.916,17.829 -26.262,19.483 R21.2@-25.157,19.483 ; R21.2@-25.482,19.083 -25.157,19.408 R21.2@-25.157,19.483 ; R21.2 R21.2@-25.157,19.483 ; R21.2@-25.144,19.419 -25.144,22.974 R20.1
NetJ0_1: J0.1 L20.2 | length 5.1
  Top Layer w0.3: J0.1 L20.2
NetJ1_1: J1.1 L21.2 | length 3.8
  Top Layer w0.3: J1.1 L21.2
NetJ2_1: J2.1 L22.1 | length 6.4
  Top Layer w0.3: J2.1 L22.1 L22.1@-103.124,11.787
NetJ3_1: J3.1 L23.1 | length 3.8
  Top Layer w0.3: J3.1 L23.1
NetK5_3: K5.3 R16.2 T1.2 | length 17.1
  Top Layer w0.3: K5.3 -60.731,23.142 -60.678,23.089 R16.2 -60.604,21.135 v1(-60.604,18.669) ; T1.2 -60.571,10.973 -60.571,12.606 v1(-60.477,12.7)
  Bottom Layer w0.3: v1(-60.604,18.669) -60.541,18.605 -60.541,12.763 v1(-60.477,12.7)
NetK5_4: K5.4 R14.2 T2.2 | length 22.5
  Top Layer w0.3: T2.2 -55.974,14.29 -55.97,14.294 -55.97,25.949 -57.429,27.407 -57.434,27.407 -57.84,27.813 K5.4
NetK7_2: ESP32.P$36 K7.2 | length 25.2
  Top Layer w0.3: ESP32.P$36 -72.034,29.083 -71.272,29.845 -71.272,36.4 -71.097,36.576 -62.763,36.576 -60.79,38.55 -60.79,39.566 K7.2
NetK7_3: ESP32.P$33 K7.3 | length 30.8
  Top Layer w0.3: ESP32.P$33 -62.509,25.273 -62.001,25.781 -62.001,35.814 K7.3
NetL20_1: ESP32.P$24 L20.1 | length 4.1
  Top Layer w0.3: ESP32.P$24 -73.05,13.843 L20.1
NetL21_1: ESP32.P$23 L21.1 | length 9.2
  Top Layer w0.3: ESP32.P$23 -71.804,12.573 -71.78,12.597 L21.1
NetL22_2: ESP32.P$14 L22.2 | length 9
  Top Layer w0.3: L22.2 -94.147,15.137 ESP32.P$14
NetL23_2: ESP32.P$16 L23.2 | length 4
  Top Layer w0.3: L23.2 -98.069,12.573 ESP32.P$16
NetLED1_1: LED1.1 R17.1 | length 4.9
  Top Layer w0.3: LED1.1 -106.451,38.735 R17.1
NetLED2_1: LED2.1 R18.1 | length 4.8
  Top Layer w0.3: LED2.1 -111.239,30.772 -107.912,30.772 R18.1
NetLED3_1: LED3.1 R19.1 | length 4.5
  Top Layer w0.3: LED3.1 R19.1
NetLED4_2: LED4.2 R22.1 | length 2.1
  Top Layer w0.3: LED4.2 -43.84,34.963 R22.1
  Top Layer w0.45: LED4.2 LED4.2@-43.796,36.785
NetR14_1: R14.1 T1.1 | length 3.1
  Top Layer w0.3: T1.1 -58.765,11.104 -58.492,11.377 R14.1
NetR15_1: ESP32.P$25 R15.1 S2.2 T2.3 | length 68
  Top Layer w0.3: S2.2 -108.213,0.762 -80.162,0.762 -79.527,1.397 -79.527,14.937 -79.352,15.113 ESP32.P$25 -61.536,15.113 -61.409,15.24 -58.651,15.24 -57.482,16.408 R15.1
NetR16_1: R16.1 T2.1 | length 5.4
  Top Layer w0.3: T2.1@-63.652,16.129 -63.652,20.904 -63.652,21.135 R16.1 R16.1@-63.578,20.904
NetR17_2: ESP32.P$10 R17.2 | length 24
  Top Layer w0.3: R17.2 -106.451,33.528 -104.546,31.623 -104.546,27.051 -97.688,20.193 ESP32.P$10
NetR18_2: ESP32.P$11 R18.2 | length 17.7
  Top Layer w0.3: R18.2 -106.451,27.178 -98.323,19.05 -94.25,19.05 ESP32.P$11
NetR19_2: ESP32.P$12 R19.2 | length 13.1
  Top Layer w0.3: R19.2 -105.143,22.708 -104.843,22.408 -104.818,22.408 -100.063,17.653 ESP32.P$12
RXD: ESP32.P$34 K5.2 K6.3 | length 20.3
  Top Layer w0.3: ESP32.P$34 -64.541,26.543 K5.2 K6.3
TXD: ESP32.P$35 K5.1 K6.2 | length 17.2
  Top Layer w0.3: ESP32.P$35 K5.1 K6.2
pads on no net: ESP32.P$4 ESP32.P$5 ESP32.P$6 ESP32.P$7 ESP32.P$8 ESP32.P$9 ESP32.P$13 ESP32.P$17 ESP32.P$18 ESP32.P$19 ESP32.P$20 ESP32.P$21 ESP32.P$22 ESP32.P$26 ESP32.P$27 ESP32.P$28 ESP32.P$29 ESP32.P$30 ESP32.P$31 ESP32.P$32 ESP32.P$37 ESP32.P$39 ESP32.P$40 ESP32.P$41 ESP32.P$42 ESP32.P$43 ESP32.P$44 ESP32.P$45 ESP32.P$46 ESP32.P$47 IC5.6 K1.MH1 K1.MH2 K2.MH1 K2.MH2 K3.MH1 K3.MH2 K4.MH1 K4.MH2 K6.1 K6.4 K6.5 K8.MH1 K8.MH2 S1.2 S1.3 S2.1 S2.4

## Polygon pours and split planes (outlines as drawn)
GND on Top Layer "GND_L01_P000" (solid, remove dead copper, pour order 0): -117.618,43.434 -0.356,43.434 -0.356,0.508 -117.734,0.508

## Silkscreen, mask and mechanical layers (free items; w line width, h text height)
Top Overlay:
  lines w0.254: -47.269,43.815 -47.269,9.271 -46.761,8.763 -46.761,0.127
  text "I2C" at -66.954,41.402 h1.25 r270
  text "3V3" at -63.652,37.719 h0.75 r270
  text "SCL" at -61.112,37.719 h0.75 r270
  text "SDA" at -58.445,37.719 h0.75 r270
  text "GND" at -55.905,37.719 h0.75 r270
  text "FTDI" at -72.034,35.814 h1.25 r270
  text "GND" at -55.905,31.75 h0.75 r270
  text "RX" at -66.319,31.623 h0.75 r270
  text "TX" at -63.652,31.623 h0.75 r270
  text "UART" at -69.494,29.972 h1.25 r270
  text "RX" at -66.192,25.781 h0.75 r270
  text "TX" at -63.652,25.781 h0.75 r270
  text "RTS" at -60.985,25.781 h0.75 r270
  text "DTR" at -58.572,25.654 h0.75 r270
  text "GND" at -55.905,25.527 h0.75 r270
  text "Cas Truyers" at -3.467,20.955 h0.8 r90
  text "voltage reg." at -45.872,6.683 h1
  text "<<3.3V" at -45.618,4.572 h1
  text "4XVout>>" at -41.935,2.921 h1
  text "< < PWM > >" at -93.497,2.54 h1.52
  text "EP32-PWM" at -60.35,2.413 h1.52
  text "LedDivers>>" at -44.856,1.143 h1
boardOutline:
  the board outline again, w0.254

## Text inside footprints (layer, text, board x,y; h text height)
C21: Top Overlay "+" at -11.836,16.002 h1.5 r180
LED4: Top Overlay "K" at -41.681,40.767 h0.76 r90; Mechanical 15 "K" at -43.332,40.767 h0.76 r90